# Altium PCB Nano_Jtag.PcbDoc
Units mm, origin at the board's own origin, x right, y up, seen from the top; angles counter-clockwise.
Board outline 16.21 x 8.86 mm, 2 copper layers (Top1, Bottom4), stack 1.071 mm thick; 3 components, 6 nets, 12 pads, 0 vias.
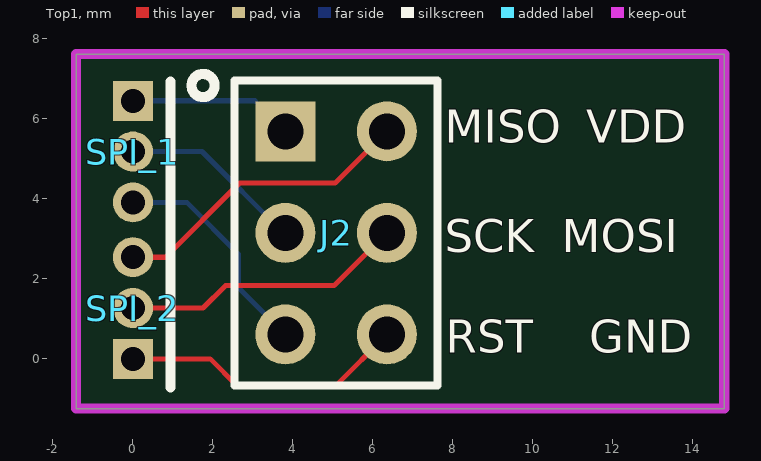
[diagram p0: Top1 view]
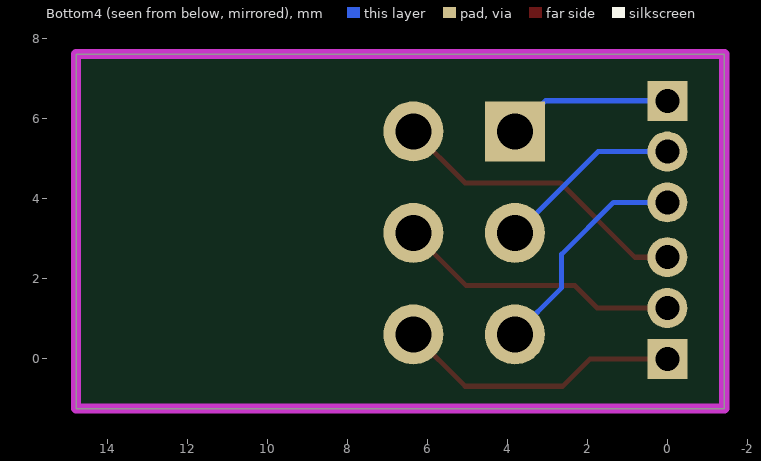
[diagram p1: Bottom4 view, seen from below]

## Layer stack, top to bottom
Top Solder: solder mask 0.0102, Solder Resist, Dk 3.5
Top1: signal copper 0.0356
Dielectric 2: core 1, PP-006, Dk 4.2
Bottom4: signal copper 0.0356
Bottom Solder: solder mask 0.0102, Solder Resist, Dk 3.5

## Board outline
-1.422,-1.245 14.783,-1.245 14.783,7.62 -1.422,7.62

## Design rules (kind name [scope] priority, off if disabled: settings)
Clearance [All] p1: gap=0.127 ignorepadtopadclearanceinfootprint=FALSE
ComponentClearance [All] p1: gap=0 collisioncheckmode=3 verticalgap=0 showdistances=FALSE
DiffPairsRouting [All] p1: maxlimit=0.229 minlimit=0.229 mostfreqgap=0.229 toplayer_minwidth=0.102 toplayer_maxwidth=0.102 toplayer_prefwidth=0.102 bottomlayer_minwidth=0.102 bottomlayer_maxwidth=0.102 bottomlayer_prefwidth=0.102 maxuncoupledlength=12.7
FanoutControl Fanout_BGA [All] p1: bgadir=Out bgaviamode=Centered fanoutstyle=Auto fanoutdirection=Alternating viagrid=0.025 // Fanout_BGA (Default Rule)
HoleSize [All] p1: absolutevalues=TRUE maxlimit=254 minlimit=0.203 maxpercent=80.000 minpercent=20.000
MinimumSolderMaskSliver [All] p1 off: minsoldermaskwidth=0.051
PlaneClearance [All] p1: clearance=0.203
PlaneConnect [All] p1: planeconnectstyle=Direct reliefexpansion=0.508 reliefentries=4 reliefconductorwidth=0.254 reliefairgap=0.254
PolygonConnect [All] p1: connectstyle=Direct reliefconductorwidth=0.254 reliefentries=4 polygonreliefangle="90 Angle" airgapwidth=0.254
RoomDefinition Nano_Jtag [InComponentClass('Nano_Jtag')] p1: confinementstyle=ConfineIn formatcopy=TRUE lockcomponents=FALSE outline -4.2,-6.645 15.028,-6.645 15.028,11.491 -4.2,11.491
RoutingVias [All] p1: holewidth=0.203 width=0.406 viastyle="Through Hole" minholewidth=0.152 minwidth=0.305 maxholewidth=0.711 maxwidth=1.27
SilkToBoardRegionClearance [All] p1 off:
SilkToSilkClearance [All] p1: silktosilkclearance=0
SilkToSolderMaskClearance [IsPad] p1: minsilkscreentomaskgap=0 clearancetoexposedcopper=TRUE
SolderMaskExpansion [All] p1: expansion=0.076
Width BAT [InNet('VBAT')] p1: maxlimit=0.254 minlimit=0.254 preferedwidth=0.254
Width BAT_IN [InNet('VBAT_IN')] p2: maxlimit=0.254 minlimit=0.254 preferedwidth=0.254
Width [All] p3: maxlimit=254 minlimit=0.127 preferedwidth=0.127
20 further rules are at their usual default settings.

## Components (designator, comment, footprint, x,y, rotation, side; value= is the part's Value field where it differs from the comment)
J2 "Pin HDR2X3" "Pin HDR2X3/2.54mm-S" 3.81,5.69 r270 top
SPI_1 "Header3_1.27mm" HEADER3_1.27mm 0,6.452 r0 top
SPI_2 "Header3_1.27mm" HEADER3_1.27mm 0,0 r180 top

## Footprints (in the part's own frame and the unit in brackets; to place one, negate y for a bottom-side part, rotate by r counter-clockwise, add the part's x,y. Pads: shape width x height; smd on the part's side, far side on the other; paste and mask are expansions set on the pad)
HEADER3_1.27mm [mm]
  rect 1x1 hole 0.6: 1(0,0)
  round 1 hole 0.6: 2(0,-1.27) 3(0,-2.54)
"Pin HDR2X3/2.54mm-S" [mm] "Connector; Header; 3x2 Position"
  rect 1.5x1.5 hole 0.9: 1(0,0)
  round 1.5 hole 0.9: 2(0,2.54) 3(2.54,0) 4(2.54,2.54) 5(5.08,0) 6(5.08,2.54)
  silkscreen extent -1.27,-1.27 6.35,3.81, body extent -1.27,-1.27 6.35,3.81, height 7.58

## Nets (pads, with @x,y where several pads share a name; then routed paths per layer and width w, separated by ;. In a path a pad name is that pad's centre, name@x,y a point inside that pad or via, vN(x,y) a via of type N, cw(c..) or ccw(c..) an arc to the next point about the centre after c; other vN are vias at no path point)
GND: J2.6 SPI_2.1 | length 7.2
  Top1 w0.127: SPI_2.1 1.93,0 2.616,-0.686 5.055,-0.686 J2.6
MCU_MISO: J2.1 SPI_1.1 | length 4.1
  Bottom4 w0.127: SPI_1.1 3.048,6.452 J2.1
MCU_MOSI: J2.4 SPI_2.2 | length 7.1
  Top1 w0.127: SPI_2.2 1.753,1.27 2.311,1.829 5.029,1.829 J2.4
MCU_SCK: J2.3 SPI_1.2 | length 4.7
  Bottom4 w0.127: SPI_1.2 1.727,5.182 3.759,3.15 J2.3
RESET: J2.5 SPI_1.3 | length 5.7
  Bottom4 w0.127: SPI_1.3 1.346,3.912 2.642,2.616 2.642,1.778 J2.5
VDD_5V: J2.2 SPI_2.3 | length 7.7
  Top1 w0.127: SPI_2.3 0.813,2.54 2.667,4.394 5.055,4.394 J2.2

## Polygon pours and split planes (outlines as drawn)
no net on Top1 "Top1-No Net" (solid, pour order 6): -90.991,29.829

## Keep-outs
Keep-Out Layer:
  the board outline again, w0.254

## Silkscreen, mask and mechanical layers (free items; w line width, h text height)
Top Overlay:
  circle w0.254: c1.753,6.833 r0.29
  lines w0.254: 0.94,-0.711 0.94,6.934
  text "MISO" at 7.798,5.131 h1.4
  text "VDD" at 11.328,5.131 h1.4
  text "SCK" at 7.798,2.388 h1.4
  text "MOSI" at 10.719,2.388 h1.4
  text "RST" at 7.823,-0.127 h1.4
  text "GND" at 11.414,-0.127 h1.4